# Altium PCB Bicikli_V1.PcbDoc (part 1 of 2)
Units mil, origin at the board's own origin, x right, y up, seen from the top; angles counter-clockwise.
Board outline 8366.14 x 3818.9 mil, 2 copper layers (Top Layer, Bottom Layer); 165 components, 79 nets, 501 pads, 940 vias.
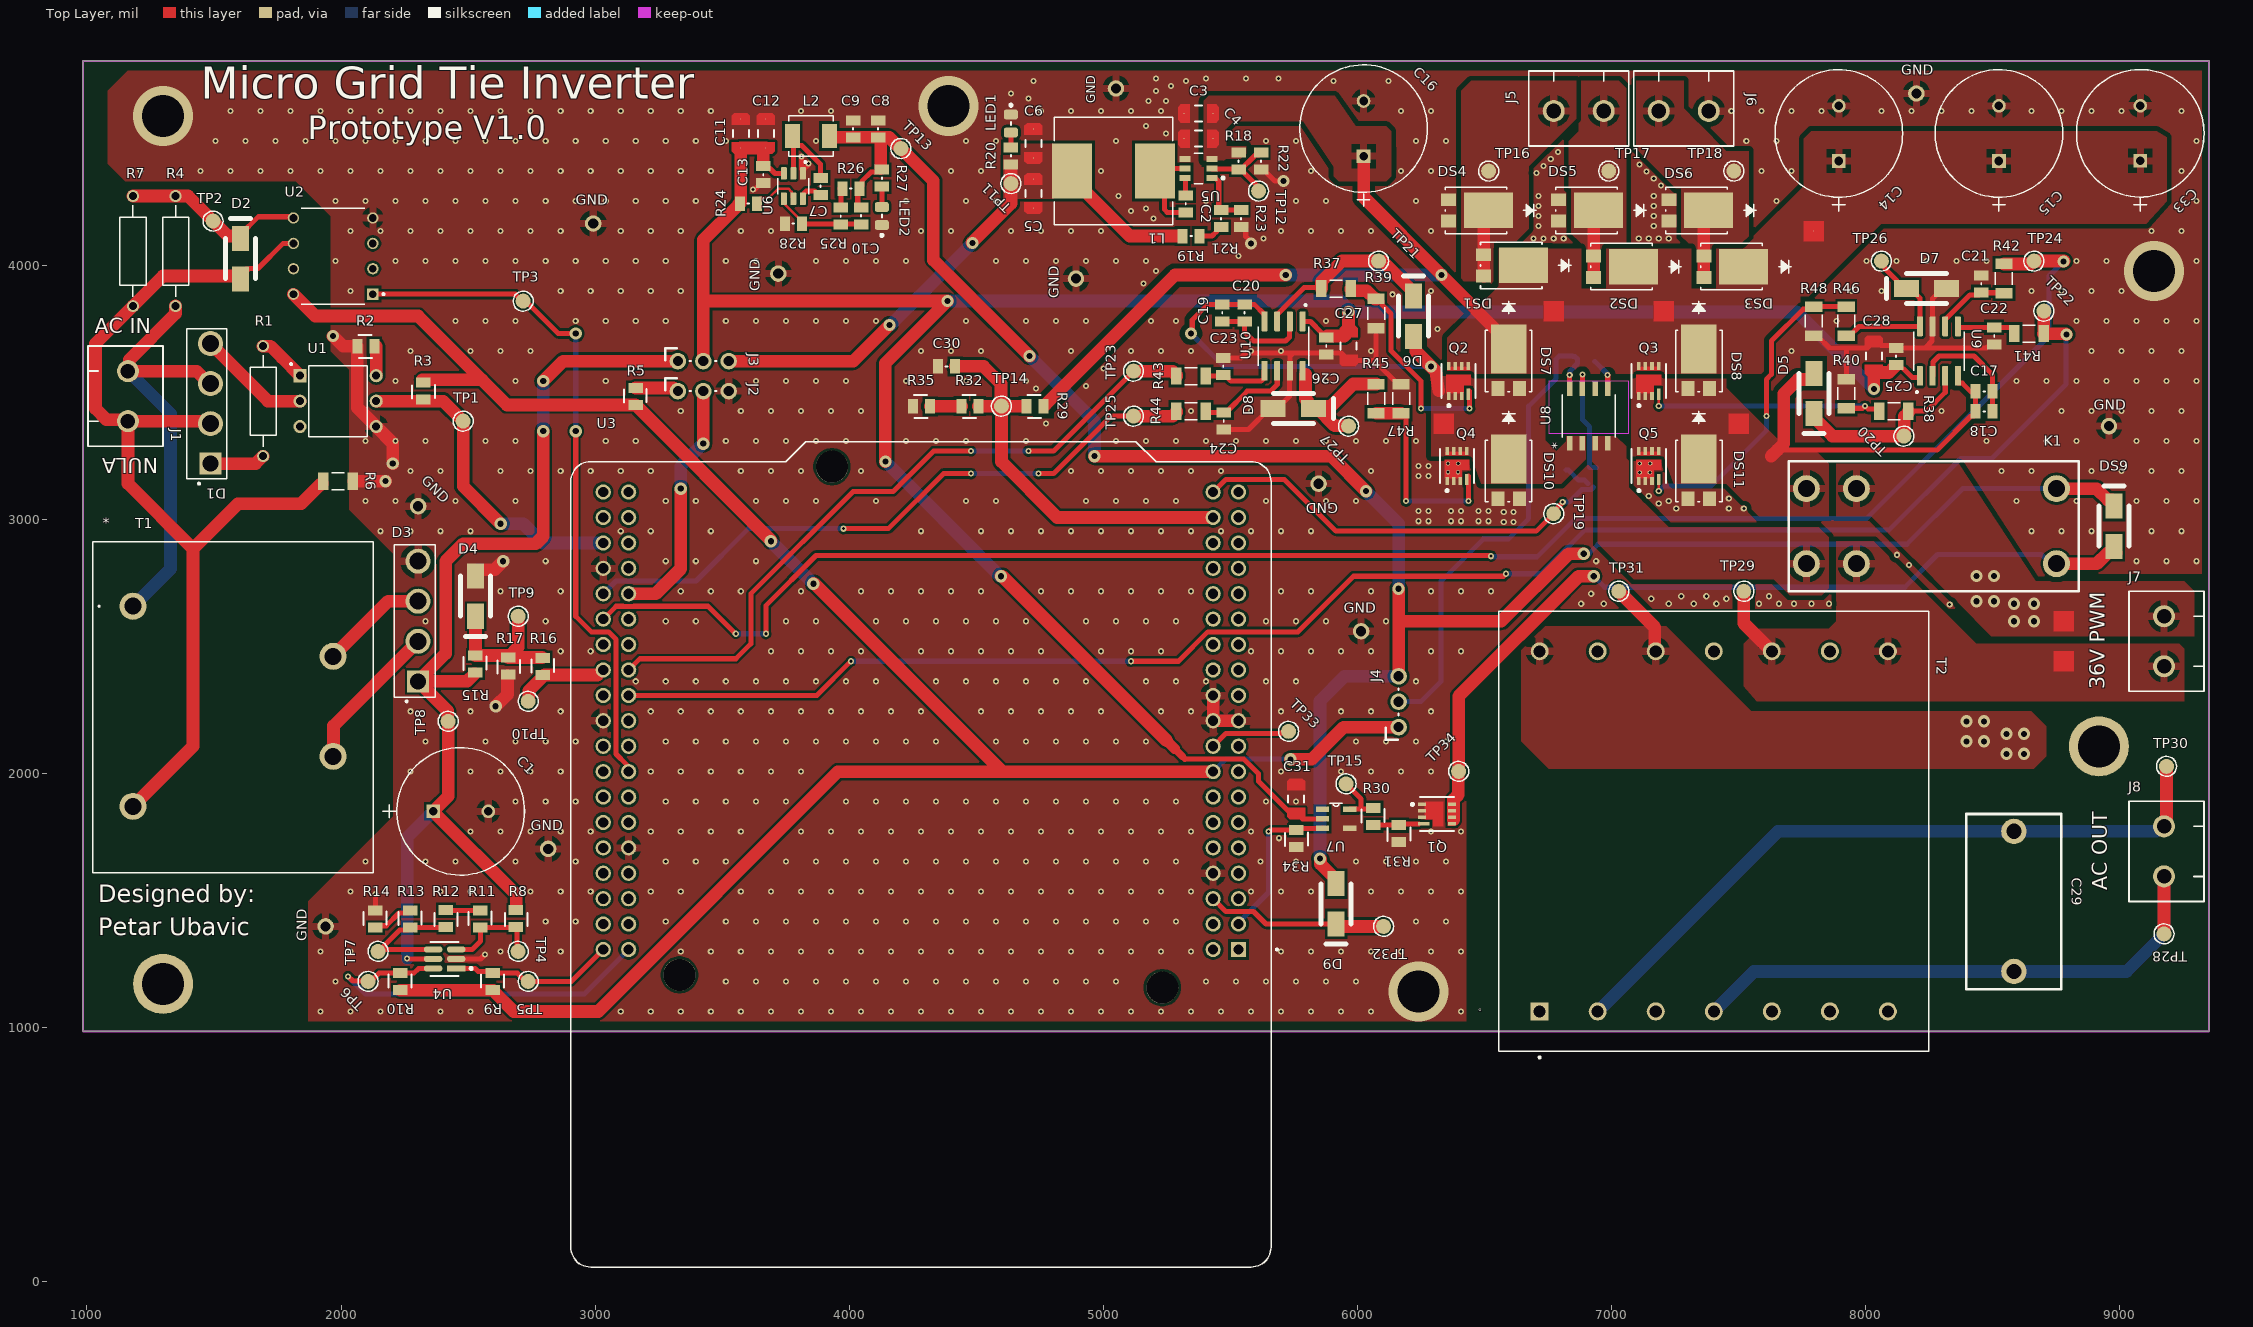
[diagram p0: Top Layer view]
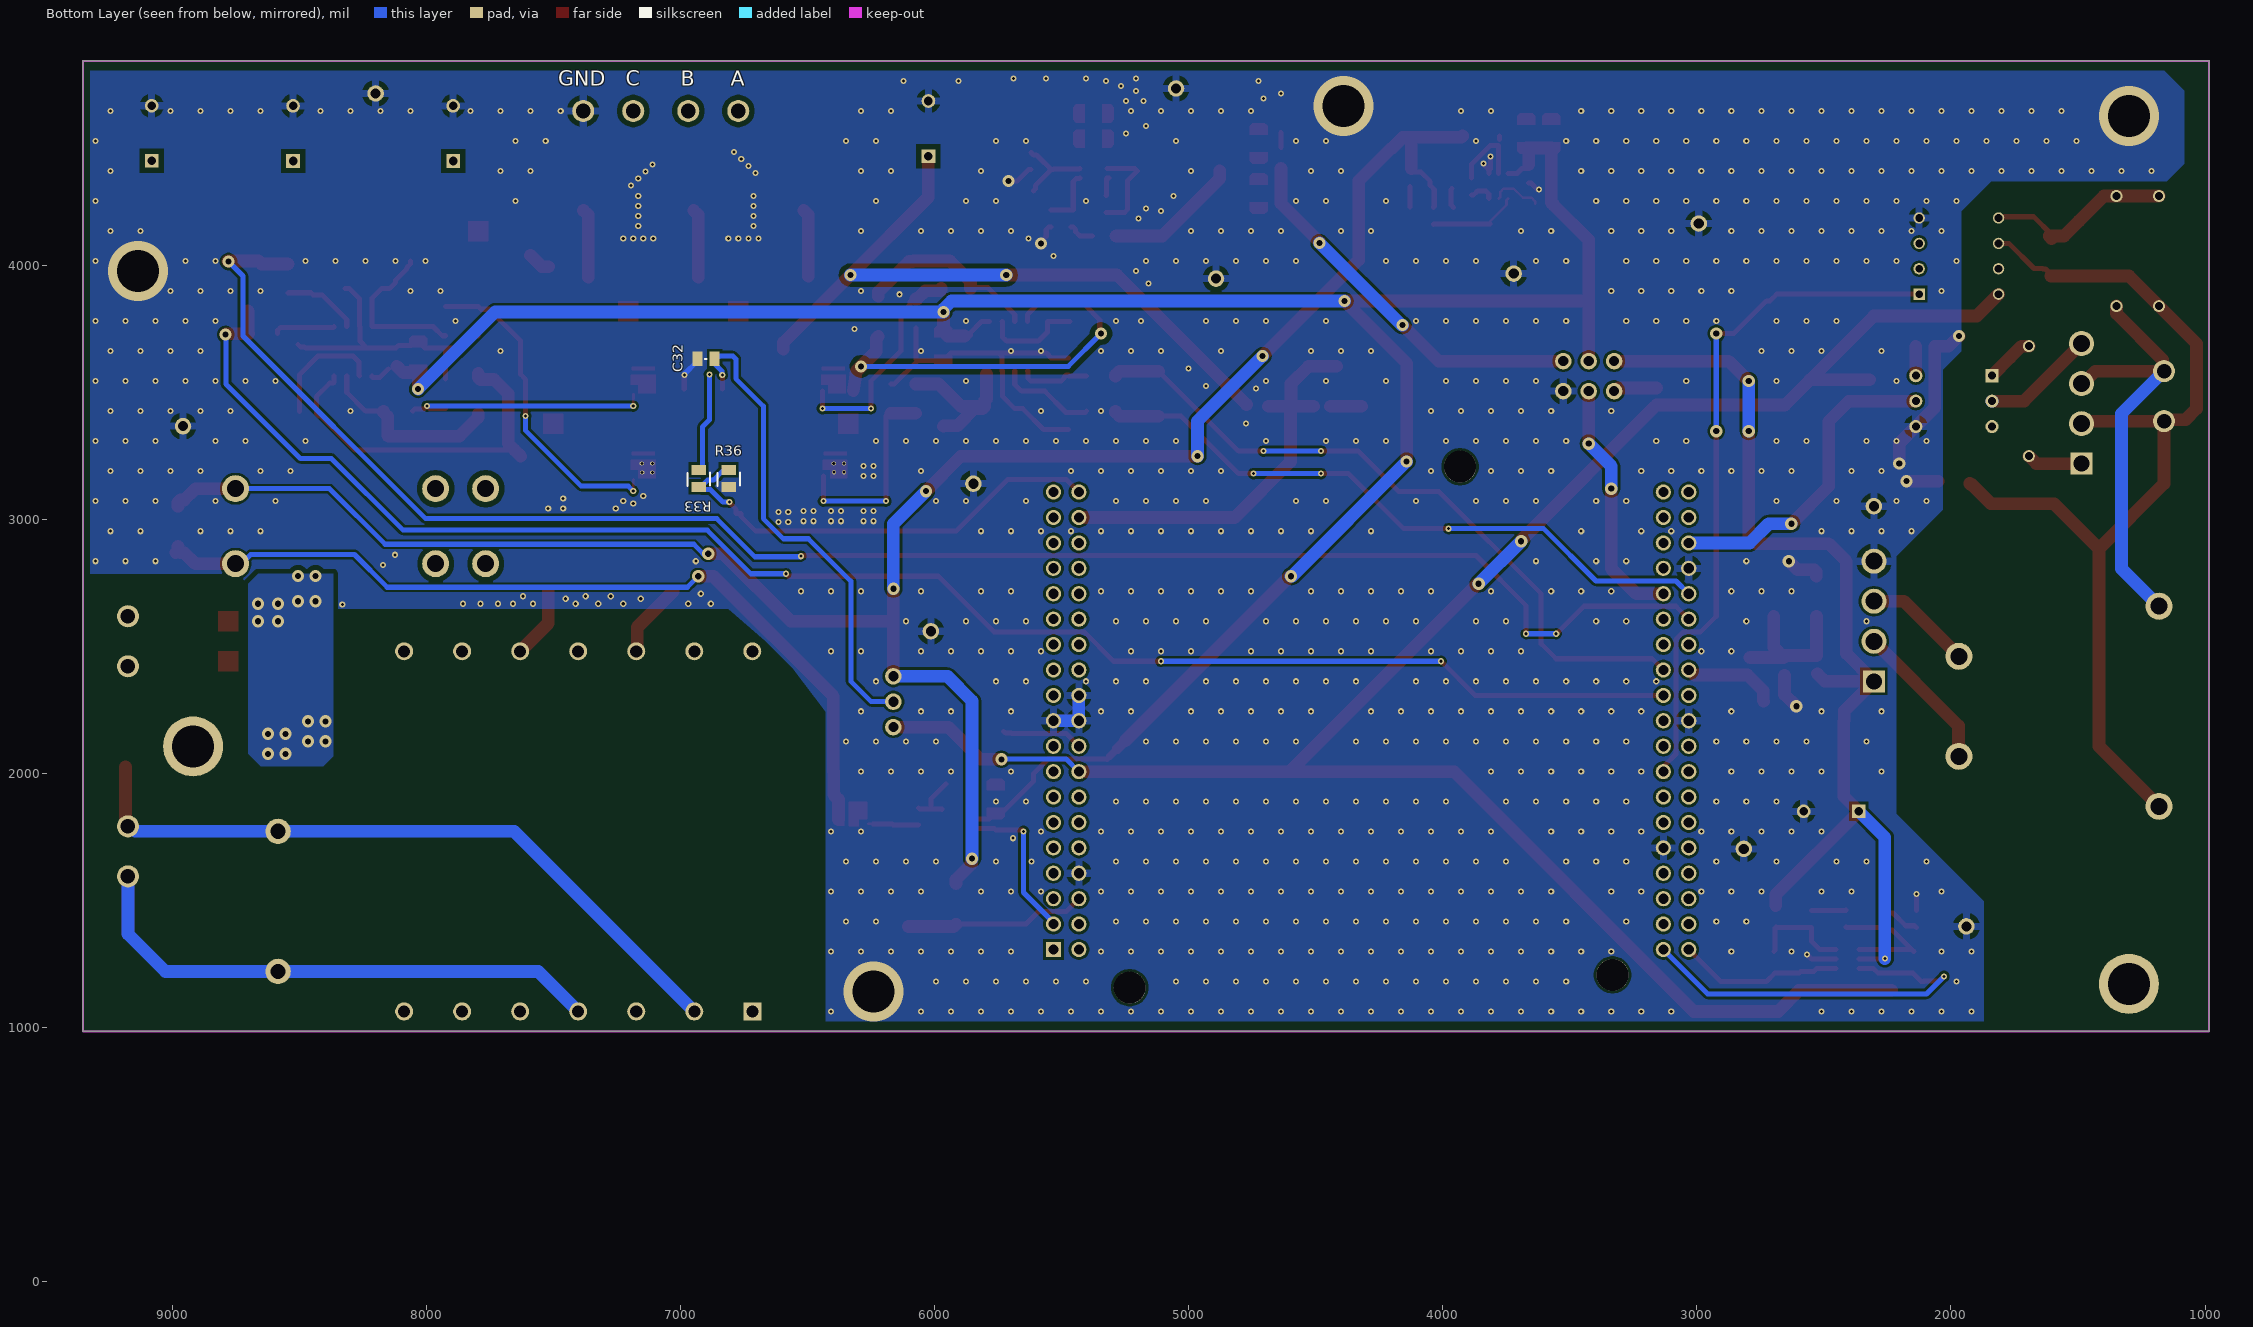
[diagram p1: Bottom Layer view, seen from below]
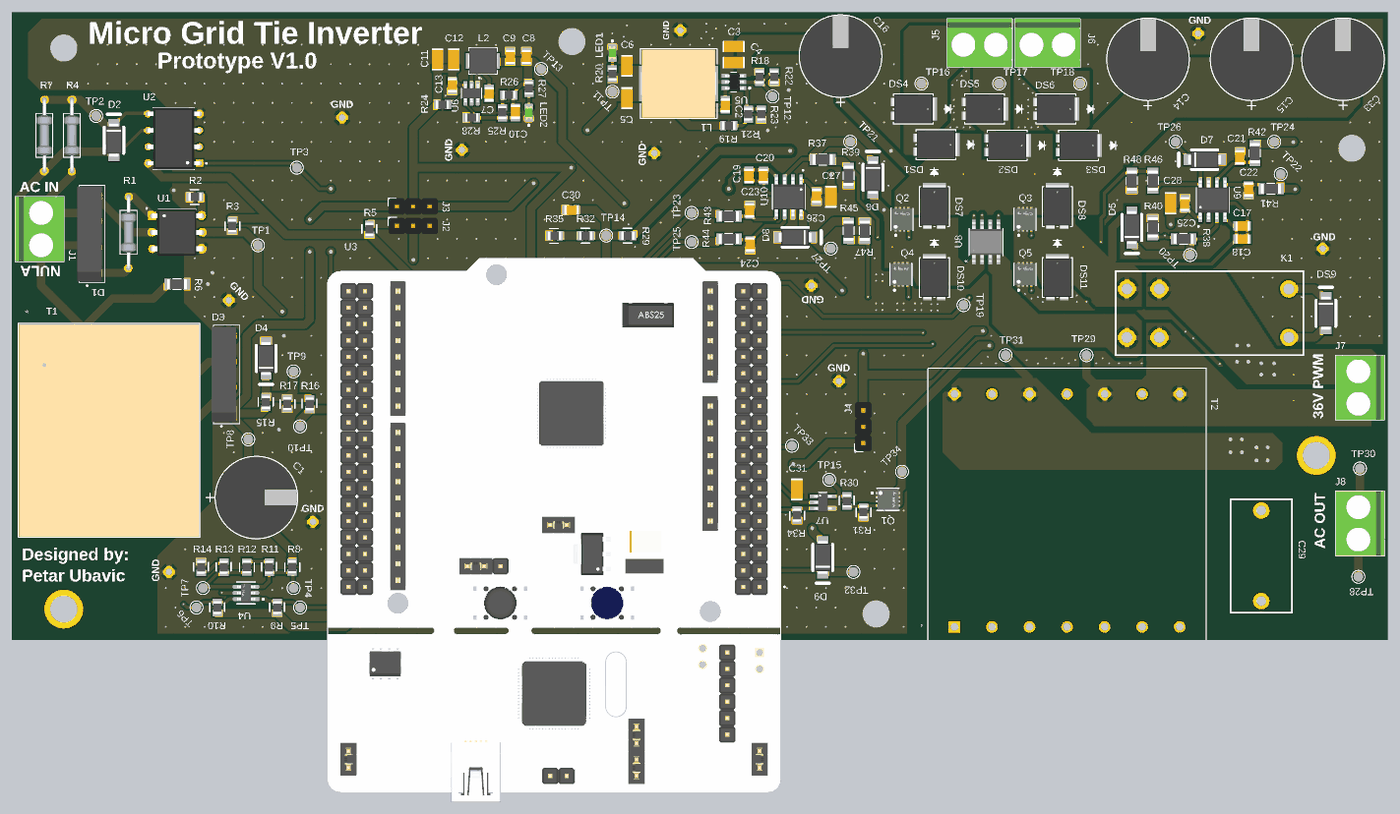
[diagram p3: 3D render of the assembled board from above, using the file's embedded part models]
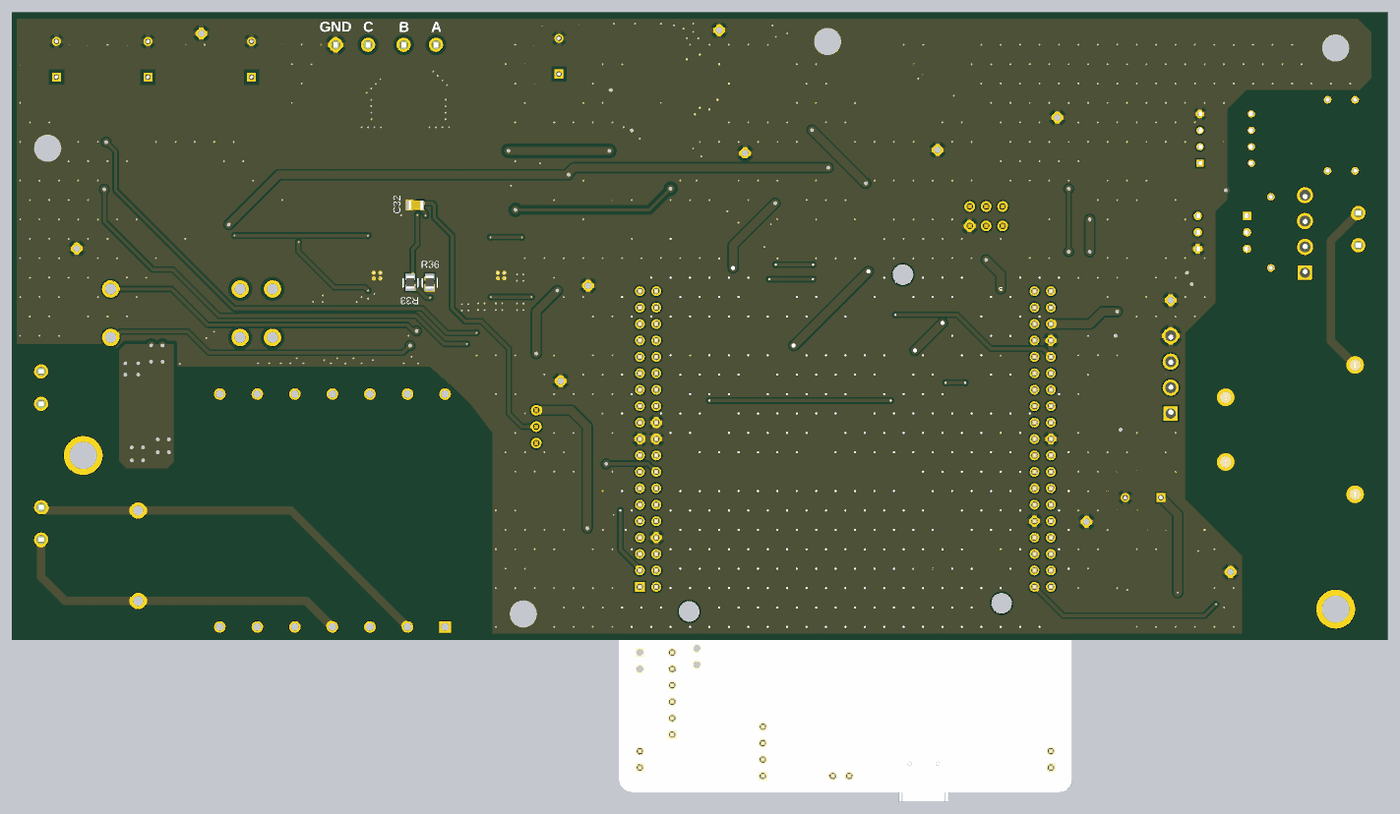
[diagram p4: 3D render of the assembled board from below, using the file's embedded part models]

## Layer stack, top to bottom
Top Solder: solder mask 0.4, Solder Resist, Dk 3.5
Top Layer: signal copper 1.4
Dielectric 1: dielectric 12.6, FR-4, Dk 4.8
Bottom Layer: signal copper 1.4
Bottom Solder: solder mask 0.4, Solder Resist, Dk 3.5

## Board outline
984.25,984.25 9350.39,984.25 9350.39,4803.15 984.25,4803.15

## Design rules (kind name [scope] priority, off if disabled: settings)
Clearance Clearance_PWR [InNetClass('PWR') vs InNetClass('SveOsimGejtSignala')] p1: gap=10 ignorepadtopadclearanceinfootprint=TRUE except(14: Arc-Region Track-Region SMDPad-Region THPad-Region Via-Region Fill-Region Poly-Region Region-Region; 15: Arc-Via Track-Via SMDPad-Via THPad-Via Via-Via; 20: Arc-Fill Arc-Poly Track-Fill Track-Poly SMDPad-Fill SMDPad-Poly THPad-Fill THPad-Poly Via-Fill Via-Poly Fill-Fill Fill-Poly Poly-Poly)
Clearance Clearance_HallIN+ [InNet('HallIN+')] p2 off: gap=10 ignorepadtopadclearanceinfootprint=TRUE except(15: Arc-Via Track-Via SMDPad-Via THPad-Via Via-Via; 20: Arc-Fill Arc-Poly Arc-Region Track-Fill Track-Poly Track-Region SMDPad-Fill SMDPad-Poly SMDPad-Region THPad-Fill THPad-Poly THPad-Region Via-Fill Via-Poly Via-Region Fill-Fill Fill-Poly Fill-Region Poly-Poly Poly-Region Region-Region)
Clearance Clearance_BrRight [InNet('BrRght')] p3 off: gap=10 ignorepadtopadclearanceinfootprint=TRUE except(15: Arc-Via Track-Via SMDPad-Via THPad-Via Via-Via; 20: Arc-Fill Arc-Poly Arc-Region Track-Fill Track-Poly Track-Region SMDPad-Fill SMDPad-Poly SMDPad-Region THPad-Fill THPad-Poly THPad-Region Via-Fill Via-Poly Via-Region Fill-Fill Fill-Poly Fill-Region Poly-Poly Poly-Region Region-Region)
Clearance [All] p4: gap=10 ignorepadtopadclearanceinfootprint=FALSE
Height [All] p1: minheight=0 maxheight=2500 prefheight=500
HoleSize [All] p1: absolutevalues=TRUE maxlimit=200 minlimit=1 maxpercent=80.000 minpercent=20.000
MinimumSolderMaskSliver [All] p1: minsoldermaskwidth=6
PlaneConnect [All] p1: pad.planeconnectstyle=Relief pad.reliefexpansion=20 pad.reliefentries=4 pad.reliefconductorwidth=20 pad.reliefairgap=10 via.planeconnectstyle=Direct via.reliefexpansion=20 via.reliefentries=4 via.reliefconductorwidth=10 via.reliefairgap=10
PolygonConnect [All] p1: thpad.connectstyle=Relief thpad.reliefconductorwidth=30 thpad.reliefentries=4 thpad.polygonreliefangle="90 Angle" thpad.airgapwidth=20 smdpad.connectstyle=Direct smdpad.reliefconductorwidth=10 smdpad.reliefentries=4 smdpad.polygonreliefangle="90 Angle" smdpad.airgapwidth=10 via.connectstyle=Direct via.reliefconductorwidth=10 via.reliefentries=4 via.polygonreliefangle="90 Angle" via.airgapwidth=10
RoutingVias [All] p1: holewidth=28 width=50 viastyle="Through Hole" minholewidth=28 minwidth=50 maxholewidth=28 maxwidth=50
SilkToSilkClearance [All] p1: silktosilkclearance=8
SilkToSolderMaskClearance [IsPad] p1: minsilkscreentomaskgap=6 clearancetoexposedcopper=TRUE
SolderMaskExpansion [All] p1: expansion=4 istentingtop=FALSE
SupplyNets "Schematic Supply Nets_3" [InNet('+36V')] p1: voltage=0.000
SupplyNets "Schematic Supply Nets_1" [InNet('+5v')] p2: voltage=0.000
SupplyNets "Schematic Supply Nets_12" [InNet('12V_TR')] p3: voltage=0.000
SupplyNets "Schematic Supply Nets_9" [InNet('12V_Buck')] p4: voltage=0.000
SupplyNets "Schematic Supply Nets_7" [InNet('12V_AC_PH')] p5: voltage=0.000
SupplyNets "Schematic Supply Nets_6" [InNet('GND')] p6: voltage=0.000
SupplyNets "Schematic Supply Nets_5" [InNet('+3v3')] p7: voltage=0.000
SupplyNets "Schematic Supply Nets_4" [InNet('Phase')] p8: voltage=0.000
SupplyNets "Schematic Supply Nets_2" [InNet('NULA')] p9: voltage=0.000
SupplyNets "Schematic Supply Nets" [InNet('12V')] p10: voltage=0.000
Width [All] p1: maxlimit=50 minlimit=10 preferedwidth=20
24 further rules are at their usual default settings.

## Classes and differential pairs
net class SveOsimGejtSignala: 12V 12V_AC_PH 12V_ADC 12V_Buck 12V_TR 24VAC+ 24VAC- +3v3 +5v +36V A B BrRght C FB5V FB36V FB_1 GND GridTie HallIN+ HallIN- HallSens "HO L" "HO R" "LO L" "LO R" NetC2_1 NetC2_2 NetC7_2 NetC17_2 NetC19_2 NetC21_2 NetC22_2 NetC23_2 NetC24_2 NetC29_1 NetC29_2 NetC32_2 NetD1_1 NetD1_4 NetD3_2 NetD4_2 NetD9_2 NetJ2_1 NetLED1_2 NetLED2_2 NetQ1_4 NetQ4_4 NetQ5_4 NetR1_1 NetR2_2 NetR8_1 NetR11_1 NetR12_1 NetR13_1 NetR18_1 NetR19_1 NetR24_1 NetR30_1 NetR32_1 NetR33_2 NetTP33_1 NULA OV Phase Phase_ADC Relay SW TIM1_CH1 TIM1_CH1N TIM1_CH2 TIM1_CH2N UV VSens ZeroTrig ZeroTrigOpto
net class PWR: 24VAC+ 24VAC- +36V A B BrRght C HallIN+ HallIN-
component class U_HBridge&Rectifier: C14 C15 C16 C17 C18 C19 C20 C21 C22 C23 C24 C25 C26 C27 C28 C29 C30 C31 C32 C33 D5 D6 D7 D8 DS1 DS2 DS3 DS4 DS5 DS6 DS7 DS8 DS9 DS10 DS11 J4 J5 J6 J7 J8 K1 Q1 Q2 Q3 Q4 Q5 R29 R30 R31 R32 R33 R34 R35 R36 R37 R38 R39 R40 R41 R42 R43 R44 R45 R46 R47 R48 T2 TP14 TP15 TP16 TP17 TP18 TP19 TP20 TP21 TP22 TP23 TP24 TP25 TP26 TP27 TP28 TP29 TP30 TP31 TP34 U7 U8 U9 U10
component class U_BUCK: C2 C3 C4 C5 C6 C7 C8 C9 C10 C11 C12 C13 J3 L1 L2 LED1 LED2 R18 R19 R20 R21 R22 R23 R24 R25 R26 R27 R28 TP11 TP12 TP13 U5 U6
component class Bicikli: C1 D1 D2 D3 D4 D9 J1 J2 R1 R2 R3 R4 R5 R6 R7 R8 R9 R10 R11 R12 R13 R14 R15 R16 R17 S T1 TP1 TP2 TP3 TP4 TP5 TP6 TP7 TP8 TP9 TP10 TP32 TP33 U1 U2 U3 U4

## Components (designator, comment, footprint, x,y, rotation, side; value= is the part's Value field where it differs from the comment)
C1 "1000uF 50V" "CAP_12.5 X 25_NCH" 2362.2,1850.39 r0 top
C2 "100n" CAP_0805 5324.8,4242.13 r270 top
C3 "10uF" CAP_1206 5374.02,4596.46 r0 top
C4 "10uF" CAP_1206 5374.02,4498.03 r0 top
C5 "22uF" CAP_1206 4724.41,4281.5 r90 top
C6 "22uF" CAP_1206 4724.41,4478.35 r270 top
C7 "100n" CAP_0805 3887.8,4311.02 r270 top
C8 "22u" CAP_0805 4114.17,4537.4 r270 top
C9 "22u" CAP_0805 4015.75,4537.4 r270 top
C10 "15p" CAP_0805 4045.28,4192.91 r90 top
C11 "10u" CAP_1206 3572.83,4517.72 r270 top
C12 "10u" CAP_1206 3671.26,4517.72 r270 top
C13 "100n" CAP_0805 3660.48,4355.27 r90 top
C14 "1000uF 50V" "CAP_12.5 X 25_NCH" 7893.7,4409.45 r90 top
C15 "1000uF 50V" "CAP_12.5 X 25_NCH" 8523.62,4409.45 r90 top
C16 "1000uF 50V" "CAP_12.5 X 25_NCH" 6023.62,4428.67 r90 top
C17 "100n" CAP_0805 8464.57,3503.94 r0 top
C18 "1n" CAP_0805 8464.57,3425.2 r0 top
C19 "100n" CAP_0805 5468.31,3813.17 r270 top
C20 "1n" CAP_0805 5555.96,3812.41 r270 top
C21 "1n" CAP_0805 8454.72,3927.17 r270 top
C22 "1n" CAP_0805 8503.94,3720.47 r90 top
C23 "1n" CAP_0805 5472.44,3602.36 r270 top
C24 "1n" CAP_0805 5472.44,3385.83 r90 top
C25 "100n" CAP_0805 8120.08,3641.98 r270 top
C26 "100n" CAP_0805 5875.98,3681.1 r90 top
C27 "10u" CAP_1206 5964.57,3681.1 r90 top
C28 "10u" CAP_1206 8031.5,3641.73 r270 top
C29 "TBD" CapacitorBig 8582.68,1496.06 r0 top
C30 "56p" CAP_0805 4381.89,3602.36 r0 top
C31 "10u" CAP_1206 5757.87,1899.61 r270 top
C32 "100n" CAP_0805 6899.61,3631.89 r180 bottom
C33 "1000uF 50V" "CAP_12.5 X 25_NCH" 9080,4410 r90 top
D1 "KBP208G" SIP350W80P400L1450H1280Q4 1466.54,3454.72 r90 top
D2 "SCH_DIODE" SMA 1604.33,4025.59 r90 top
D3 "KBP208G" SIP350W80P400L1450H1280Q4 2283.46,2598.43 r90 top
D4 "SCH_DIODE" SMA 2529.53,2696.85 r270 top
D5 "SCH_DIODE" SMA 7795.28,3494.09 r270 top
D6 "SCH_DIODE" SMA 6220.47,3799.21 r90 top
D7 "SCH_DIODE" SMA 8238.19,3907.48 r180 top
D8 "SCH_DIODE" SMA 5748.03,3435.04 r0 top
D9 "SCH_DIODE" SMA 5915.35,1486.22 r270 top
DS1 "PMEG45U10EPDZ" PMEG45U10EPDZ_NEX 6604.56,3998.62 r270 top
DS2 "PMEG45U10EPDZ" PMEG45U10EPDZ_NEX 7037.63,3993.5 r270 top
DS3 "PMEG45U10EPDZ" PMEG45U10EPDZ_NEX 7470.7,3993.5 r270 top
DS4 "PMEG45U10EPDZ" PMEG45U10EPDZ_NEX 6466.77,4215.16 r270 top
DS5 "PMEG45U10EPDZ" PMEG45U10EPDZ_NEX 6899.84,4215.16 r270 top
DS6 "PMEG45U10EPDZ" PMEG45U10EPDZ_NEX 7332.91,4215.16 r270 top
DS7 "PMEG45U10EPDZ" PMEG45U10EPDZ_NEX 6594.49,3622.05 r0 top
DS8 "PMEG45U10EPDZ" PMEG45U10EPDZ_NEX 7342.52,3622.05 r0 top
DS9 "SCH_DIODE" SMA 8976.38,2972.44 r90 top
DS10 "PMEG45U10EPDZ" PMEG45U10EPDZ_NEX 6594.49,3188.98 r0 top
DS11 "PMEG45U10EPDZ" PMEG45U10EPDZ_NEX 7342.52,3188.98 r0 top
J1 "Wire Terminal Block 2 pin 5mm" WireTerminalPCB5mm2PIN 1161.42,3484.25 r90 top
J2 "3Pin" HEADER3PIN 3425.2,3503.94 r0 top
J3 "3Pin" HEADER3PIN 3425.2,3622.05 r0 top
J4 "3Pin" HEADER3PIN 6161.42,2281.89 r90 top
J5 "Wire Terminal Block 2 pin 5mm" WireTerminalPCB5mm2PIN 6870.08,4606.3 r0 top
J6 "Wire Terminal Block 2 pin 5mm" WireTerminalPCB5mm2PIN 7283.46,4606.3 r0 top
J7 "Wire Terminal Block 2 pin 5mm" WireTerminalPCB5mm2PIN 9173.23,2519.68 r270 top
J8 "Wire Terminal Block 2 pin 5mm" WireTerminalPCB5mm2PIN 9173.23,1692.91 r270 top
K1 "K1" AZ733-2AE-5DE 8287.4,2952.76 r180 top
L1 "AMRM00101040100MA1" IND_AMRM00101040_PUL 5039.37,4370.08 r0 top
L2 "SRP4020TA-3R3M" IND_SRP4020TA-3R3M 3848.43,4507.87 r180 top
LED1 "LED GREEN" LED_GREEN_0805 4635.83,4557.09 r270 top
LED2 "LED GREEN" LED_GREEN_0805 4128,4193 r90 top
Q1 "IQE022N06LM5" IFX-PG-TSON-8-5-V 6312.2,1839.57 r0 top
Q2 "IQE022N06LM5" IFX-PG-TSON-8-5-V 6397.64,3543.31 r90 top
Q3 "IQE022N06LM5" IFX-PG-TSON-8-5-V 7145.67,3543.31 r90 top
Q4 "IQE022N06LM5" IFX-PG-TSON-8-5-V 6390.75,3208.67 r90 top
Q5 "IQE022N06LM5" IFX-PG-TSON-8-5-V 7145.67,3208.66 r90 top
R1 "10k" RESISTOR_THRUHOLE_1/4W 1692.91,3464.57 r270 top
R2 "10k" RESISTOR_0805 2096.46,3681.1 r0 top
R3 "4.7k" RESISTOR_0805 2322.83,3503.94 r90 top
R4 "1Meg" RESISTOR_THRUHOLE_1/4W 1348.43,4055.12 r270 top
R5 "4.7k" RESISTOR_0805 3159.45,3484.25 r270 top
R6 "0" RESISTOR_1206 1988.19,3149.61 r180 top
R7 "10k" RESISTOR_THRUHOLE_1/4W 1181.1,4055.12 r90 top
R8 "1Meg" RESISTOR_0805 2687.01,1427.17 r90 top
R9 "4.7k" RESISTOR_0805 2598.43,1181.1 r270 top
R10 "4.7k" RESISTOR_0805 2234.25,1181.1 r270 top
R11 "8.2k" RESISTOR_0805 2549.21,1427.17 r270 top
R12 "430" RESISTOR_0805 2411.42,1427.17 r90 top
R13 "27k" RESISTOR_0805 2273.62,1427.17 r270 top
R14 "2.4k" RESISTOR_0805 2135.83,1427.17 r270 top
R15 "10k" RESISTOR_0805 2529.53,2431.1 r270 top
R16 "0" RESISTOR_0805 2795.28,2421.26 r270 top
R17 "3.3k" RESISTOR_0805 2657.48,2421.26 r90 top
R18 "100k" RESISTOR_0805_SMALLSILK 5531.5,4409.45 r90 top
R19 "130k" RESISTOR_0805_SMALLSILK 5344.49,4114.17 r180 top
R20 "3.3k" RESISTOR_0805_SMALLSILK 4635.83,4429.13 r270 top
R21 "10k" RESISTOR_0805_SMALLSILK 5462.6,4183.07 r90 top
R22 "240k" RESISTOR_0805_SMALLSILK 5620.08,4409.45 r90 top
R23 "10k" RESISTOR_0805_SMALLSILK 5541.34,4183.07 r90 top
R24 "10k" RESISTOR_0805_SMALLSILK 3602.36,4242.13 r180 top
R25 "3.9k" RESISTOR_0805_SMALLSILK 3966.54,4192.91 r90 top
R26 "51k" RESISTOR_0805_SMALLSILK 4005.91,4301.18 r0 top
R27 "1k" RESISTOR_0805_SMALLSILK 4128,4342 r90 top
R28 "10k" RESISTOR_0805_SMALLSILK 3779.53,4163.39 r0 top
R29 "20k" RESISTOR_0805 4729.28,3445.82 r0 top
R30 "10" RESISTOR_0805 6062.99,1830.71 r270 top
R31 "1.8k" RESISTOR_0805 6161.42,1761.81 r90 top
R32 "1.2k" RESISTOR_0805 4473.38,3445.82 r0 top
R33 "0" RESISTOR_0805 6929.13,3159.45 r90 bottom
R34 "4.7k" RESISTOR_0805 5757.87,1742.13 r90 top
R35 "0" RESISTOR_0805 4283.46,3444.88 r0 top
R36 "0" RESISTOR_0805 6811.02,3159.45 r90 bottom
R37 "10" RESISTOR_1206 5915.35,3907.48 r0 top
R38 "10" RESISTOR_1206 8110.24,3425.2 r0 top
R39 "1.8k" RESISTOR_1206 6072.83,3809.06 r90 top
R40 "1.8k" RESISTOR_1206 7923.23,3494.09 r270 top
R41 "10" RESISTOR_1206 8641.73,3730.32 r0 top
R42 "10" RESISTOR_1206 8543.31,3946.85 r90 top
R43 "10" RESISTOR_1206 5344.49,3562.99 r0 top
R44 "10" RESISTOR_1206 5344.49,3425.2 r0 top
R45 "10" RESISTOR_1206 6072.83,3474.41 r270 top
R46 "10" RESISTOR_1206 7923.23,3779.21 r270 top
R47 "1.8k" RESISTOR_1206 6171.26,3474.41 r270 top
R48 "1.8k" RESISTOR_1206 7795.28,3779.21 r90 top
T1 "BV302S12023" BV302S12023_ZLM 1181.1,2657.48 r0 top
T2 "SLLC-ETD39-24" XFMR_SLLC-ETD39-48 7401.57,1771.65 r90 top
TP1 "TP" TP 2480.32,3385.83 r180 top
TP2 "TP" TP 1496.06,4173.23 r270 top
TP3 "TP" TP 2716.54,3858.27 r270 top
TP4 "TP" TP 2696.85,1299.21 r270 top
TP5 "TP" TP 2736.22,1181.1 r270 top
TP6 "TP" TP 2106.3,1181.1 r135 top
TP7 "TP" TP 2145.67,1299.21 r0 top
TP8 "TP" TP 2421.26,2204.72 r270 top
TP9 "TP" TP 2696.85,2618.11 r270 top
TP10 "TP" TP 2736.22,2283.46 r270 top
TP11 "TP" TP 4635.83,4320.87 r90 top
TP12 "TP" TP 5610.24,4291.34 r90 top
TP13 "TP" TP 4202.76,4458.66 r315 top
TP14 "TP" TP 4598.43,3444.88 r270 top
TP15 "TP" TP 5954.72,1958.66 r270 top
TP16 "TP" TP 6515.75,4370.08 r270 top
TP17 "TP" TP 6988.19,4370.08 r270 top
TP18 "TP" TP 7480.31,4370.08 r270 top
TP19 "TP" TP 6771.65,3021.65 r180 top
TP20 "TP" TP 8149.61,3326.77 r90 top
TP21 "TP" TP 6082.68,4015.75 r270 top
TP22 "TP" TP 8700.79,3818.9 r90 top
TP23 "TP" TP 5118.11,3582.68 r315 top
TP24 "TP" TP 8661.42,4015.75 r180 top
TP25 "TP" TP 5118.11,3405.51 r0 top
TP26 "TP" TP 8061.02,4015.75 r90 top
TP27 "TP" TP 5964.57,3366.14 r270 top
TP28 "TP" TP 9173.23,1368.11 r90 top
TP29 "TP" TP 7519.69,2716.54 r270 top
TP30 "TP" TP 9183.07,2027.56 r90 top
TP31 "TP" TP 7027.56,2716.54 r270 top
TP32 "TP" TP 6102.36,1397.64 r270 top
TP33 "TP" TP 5728.35,2165.35 r270 top
TP34 "TP" TP 6397.64,2007.87 r270 top
U1 "4N25" DIP762W50P254L712H400Q6N 1988.19,3464.57 r0 top
U2 "LM2903P" DIP794W45P254L959H508Q8 1968.5,4035.43 r180 top
U3 "NUCLEO-L476RG" MODULE_NUCLEO-L476RG 4281.5,1681.1 r180 top
U4 "TPS3700DDCR" FP-DDC0006A-IPC_A 2407.49,1269.69 r180 top
U5 "LMR51625XFDDCR" DDC0006A-MFG 5374.02,4379.92 r180 top
U6 "TPS562201DDCR" SOT95P280X110-6N 3779.53,4311.02 r270 top
U7 "MCP1416T-E/OT" SOT95P270X145-5N 5915.35,1820.87 r0 top
U8 "TMCS1101A3BQDRQ1" SOIC8_D_TEX 6909.45,3405.51 r90 top
U9 "UCC27282DR" SOIC127P599X175-8N 8287.4,3661.42 r90 top
U10 "UCC27282DR" SOIC127P599X175-8N 5708.66,3681.1 r270 top

## Footprints (in the part's own frame and the unit in brackets; to place one, negate y for a bottom-side part, rotate by r counter-clockwise, add the part's x,y. Pads: shape width x height; smd on the part's side, far side on the other; paste and mask are expansions set on the pad)
AZ733-2AE-5DE [mm] "Relay AZ733-2AE-5DE"
  round 2.7 hole 1.7: 1(-11.75,3.25) 3(8.25,3.25) 4(13.25,3.25) 5(13.25,-4.25) 6(8.25,-4.25) 8(-11.75,-4.25)
  silkscreen extent -14,-7 15,6
BV302S12023_ZLM [mm]
  round 2.7 hole 1.7 paste-2539.97 mask+0: 1(0,0) 5(0,-20) 7(20,-15) 9(20,-5)
  silkscreen extent -4.02,-26.62 24.02,6.43, body extent -3.89,-26.49 23.89,6.3, height 29.8
"CAP_12.5 X 25_NCH" [mil]
  rect 54x54 / inner round 60 / far side rect 54x54 hole 34 paste-99999 mask+0: 1(0,0)
  round 54 / inner round 60 / far side round 54 hole 34 paste-99999 mask+0: 2(217,0)
  silkscreen extent -198,-251 360,251, body extent -137,-245 355,245, height 985
CAP_0805 [mm]
  rect 1x1.45 smd mask+0.102: 1(-0.824,-0.024) 2(0.876,-0.024)
  silkscreen extent -0.08,-0.03 0.1,-0.03, body extent -0.97,-0.76 1.23,0.69, height 0.6
CAP_1206 [mil] "Chip Capacitor, 2-Leads, Body 3.20x1.60mm, IPC Medium Density"
  round 1 smd: 1(-57.09,0) 2(57.09,0)
  Top Layer region: -79.72,-25.28 -79.72,25.28 -69.57,35.43 -34.45,35.43 -34.45,-35.43 -69.57,-35.43
  Top Layer region: 34.45,-35.43 34.45,35.43 69.57,35.43 79.72,25.28 79.72,-25.28 69.57,-35.43
  silkscreen extent -14,-31 14,31, body extent -67,-35 67,35, height 35
CapacitorBig [mil]
  round 100 hole 60: 1(0,275.59) 2(0,-275.59)
  silkscreen extent -187,-346 187,344
DDC0006A-MFG [mm]
  rect 1.1x0.6 smd paste+0 mask+0: 1(-1.35,0.95) 2(-1.35,0) 3(-1.35,-0.95) 4(1.35,-0.95) 5(1.35,0) 6(1.35,0.95)
  silkscreen extent -2.58,-1.53 0.42,1.53, body extent -1.56,-1.45 1.31,1.45, height 0.95
DIP762W50P254L712H400Q6N [mm]
  rect 1.308x1.308 / inner round 1.308 / far side rect 1.308x1.308 hole 0.8: 1(-3.81,2.54)
  round 1.308 hole 0.8: 2(-3.81,0) 3(-3.81,-2.54) 4(3.81,-2.54) 5(3.81,0) 6(3.81,2.54)
  silkscreen extent -4.8,-3.56 2.92,3.8, body extent -3.98,-3.56 3.98,3.56, height 4
DIP794W45P254L959H508Q8 [mm]
  rect 1.13x1.13 / inner round 1.13 / far side rect 1.13x1.13 hole 0.78 mask+0.102: 1(-3.97,3.81)
  round 1.13 hole 0.78 mask+0.102: 2(-3.97,1.27) 3(-3.97,-1.27) 4(-3.97,-3.81) 5(3.97,-3.81) 6(3.97,-1.27) 7(3.97,1.27) 8(3.97,3.81)
  silkscreen extent -5.13,-4.79 3.18,4.79, body extent -4.15,-4.79 4.15,4.79, height 5.08
FP-DDC0006A-IPC_A [mm]
  rect 1.854x0.612 smd paste+0 mask+0: 1(-1.15,0.95)
  rrect100% 1.854x0.612 smd paste+0 mask+0: 2(-1.15,0) 3(-1.15,-0.95) 4(1.15,-0.95) 5(1.15,0) 6(1.15,0.95)
  silkscreen extent -2.78,-1.7 1.4,1.7, body extent -2.58,-1.95 2.58,1.95, height 0.25
HEADER3PIN [mil]
  round 65 hole 40: 1(-100,0) 2(0,0) 3(100,0)
  silkscreen extent -150,0 53,50, body extent -151,-50 149,50, height 350
IFX-PG-TSON-8-5-V [mm] "PG-TSON-8-5, 0.65 mm pitch, 8 pin, 3.30mm L X 3.30mm W X 1.10mm H body"
  rect 0.8x0.35 smd paste-0.175 mask+0: 1(-1.5,0.975) 2(-1.5,0.325) 3(-1.5,-0.325) 5(1.5,-0.975) 6(1.5,-0.325) 7(1.5,0.325) 8(1.5,0.975)
  rect 1.14x0.35 smd paste-0.175 mask+0: 4(-1.33,-0.975)
  Top Layer region: 0.655,-1.23 0.655,1.23 -1.225,1.23 -1.225,-0.5 -0.36,-0.5 -0.36,-1.23
  Top Layer region: 1.1,1.15 1.1,-1.15 1.45,-1.15 1.45,1.15
  silkscreen extent -2.58,-1.7 1.7,1.7, body extent -1.65,-1.65 1.65,1.65, height 1.11
IND_AMRM00101040_PUL [mm]
  rect 4x5.5 smd paste+0 mask+0: 1(-4.127,0) 2(4.128,0)
  silkscreen extent -5.93,-5.37 5.93,5.37, body extent -5.8,-5.24 5.8,5.24, height 3.99
IND_SRP4020TA-3R3M [mm]
  rect 1.5x2.4 smd: 1(-1.85,0) 2(1.85,0)
  silkscreen extent -2.23,-2.03 2.22,2.03, body extent -2.23,-2.03 2.22,2.03, height 2
LED_GREEN_0805 [mm]
  rrect50% 1x1.4 smd: 1(-0.9,0) 2(0.9,0)
  silkscreen extent -1.95,-0.12 0.13,0.13, body extent -1.01,-0.62 1.01,0.63, height 1.1
MODULE_NUCLEO-L476RG [mil]
  rect 60x60 / inner round 60 / far side rect 60x60 hole 40: CN7_1(-1250,374.41)
  round 60 hole 40: CN7_2(-1150,374.41) CN7_3(-1250,274.41) CN7_4(-1150,274.41) CN7_5(-1250,174.41) CN7_6(-1150,174.41) CN7_7(-1250,74.41) CN7_8(-1150,74.41) CN7_9(-1250,-25.59) CN7_10(-1150,-25.59) CN7_11(-1250,-125.59) CN7_12(-1150,-125.59) CN7_13(-1250,-225.59) CN7_14(-1150,-225.59) CN7_15(-1250,-325.59) CN7_16(-1150,-325.59) CN7_17(-1250,-425.59) CN7_18(-1150,-425.59) CN7_19(-1250,-525.59) CN7_20(-1150,-525.59) CN7_21(-1250,-625.59) CN7_22(-1150,-625.59) CN7_23(-1250,-725.59) CN7_24(-1150,-725.59) CN7_25(-1250,-825.59) CN7_26(-1150,-825.59) CN7_27(-1250,-925.59) CN7_28(-1150,-925.59) CN7_29(-1250,-1025.59) CN7_30(-1150,-1025.59) CN7_31(-1250,-1125.59) CN7_32(-1150,-1125.59) CN7_33(-1250,-1225.59) CN7_34(-1150,-1225.59) CN7_35(-1250,-1325.59) CN7_36(-1150,-1325.59) CN7_37(-1250,-1425.59) CN7_38(-1150,-1425.59) CN10_1(1150,374.41) CN10_2(1250,374.41) CN10_3(1150,274.41) CN10_4(1250,274.41) CN10_5(1150,174.41) CN10_6(1250,174.41) CN10_7(1150,74.41) CN10_8(1250,74.41) CN10_9(1150,-25.59) CN10_10(1250,-25.59) CN10_11(1150,-125.59) CN10_12(1250,-125.59) CN10_13(1150,-225.59) CN10_14(1250,-225.59) CN10_15(1150,-325.59) CN10_16(1250,-325.59) CN10_17(1150,-425.59) CN10_18(1250,-425.59) CN10_19(1150,-525.59) CN10_20(1250,-525.59) CN10_21(1150,-625.59) CN10_22(1250,-625.59) CN10_23(1150,-725.59) CN10_24(1250,-725.59) CN10_25(1150,-825.59) CN10_26(1250,-825.59) CN10_27(1150,-925.59) CN10_28(1250,-925.59) CN10_29(1150,-1025.59) CN10_30(1250,-1025.59) CN10_31(1150,-1125.59) CN10_32(1250,-1125.59) CN10_33(1150,-1225.59) CN10_34(1250,-1225.59) CN10_35(1150,-1325.59) CN10_36(1250,-1325.59) CN10_37(1150,-1425.59) CN10_38(1250,-1425.59)
  round 125.98 hole 125.98 unplated: ""(-950,524.41) ""(350,-1525.59) ""(950,474.41)
  silkscreen extent -1405,-1624 1378,1624, body extent -1378,-1624 1378,1681, height 798
PMEG45U10EPDZ_NEX [mil]
  rect 51x59 smd paste+0 mask+0: 1(41.93,-108.5) 2(-41.93,-108.5)
  rect 140x193 smd paste+0 mask+0: 3(0,47.5)
  silkscreen extent -92,-121 92,236, body extent -86,-130 86,130, height 34
RESISTOR_0805 [mm]
  rect 1x1.45 smd mask+0.102: 1(-0.824,-0.024) 2(0.876,-0.024)
  silkscreen extent -0.72,-1.19 0.61,1.09, body extent -0.97,-0.65 1.03,0.6, height 0.6
RESISTOR_0805_SMALLSILK [mm]
  rect 1x1.45 smd mask+0.102: 1(-0.849,0.002) 2(0.851,0.002)
  silkscreen extent -0.1,0 0.08,0, body extent -0.97,-0.63 1.03,0.63, height 0.6
RESISTOR_1206 [mm]
  rect 1.05x1.72 smd: 1(-1.46,0) 2(1.46,0)
  silkscreen extent -0.62,-0.85 0.62,0.85, body extent -1.55,-0.77 1.55,0.77, height 0.65
RESISTOR_THRUHOLE_1/4W [mm] "Thruhole Resistor 1/4W"
  round 1.2 hole 0.8: 1(-5.5,0) 2(5.5,0)
  silkscreen extent -4.58,-1.3 4.58,1.3, body extent -5.77,-1.2 5.77,1.2, height 2.4
SIP350W80P400L1450H1280Q4 [mm]
  rect 2.2x2.2 / inner round 2.2 / far side rect 2.2x2.2 hole 1.6: 1(-6,-0.491)
  round 2.5 hole 1.7: 2(-2,-0.491) 3(2,-0.491) 4(6,-0.491)
  silkscreen extent -8.1,-2.12 7.5,1.88, body extent -7.35,-1.65 7.35,2.15, height 12.7
SMA [mm]
  rect 2.5x1.7 smd: 1(-2.032,0) 2(2,0)
  silkscreen extent -2,-1.5 4,1.5, body extent -2.6,-1.3 2.6,1.3, height 2.4
SOIC8_D_TEX [mil]
  rect 57.5x22 smd paste+0 mask+0: 1(-107.25,75) 2(-107.25,25) 3(-107.25,-25) 4(-107.25,-75) 5(107.25,-75) 6(107.25,-25) 7(107.25,25) 8(107.25,75)
  silkscreen extent -84,-104 84,104, body extent -122,-99 122,99, height 69
SOIC127P599X175-8N [mm]
  rrect25% 1.97x0.6 smd: 1(-2.47,1.905) 2(-2.47,0.635) 3(-2.47,-0.635) 4(-2.47,-1.905) 5(2.47,-1.905) 6(2.47,-0.635) 7(2.47,0.635) 8(2.47,1.905)
  silkscreen extent -4.2,-2.53 1.95,2.52, body extent -3,-2.45 3,2.45, height 1.75
SOT95P270X145-5N [mil]
  rect 52x22 smd: 1(-54,37) 2(-54,0) 3(-54,-37) 4(54,-37) 5(54,37)
  silkscreen extent -25,49 25,61, body extent -52,-57 54,57, height 57
SOT95P280X110-6N [mm]
  rrect25% 1.25x0.59 smd: 1(-1.255,0.95) 2(-1.255,0) 3(-1.255,-0.95) 4(1.255,-0.95) 5(1.255,0) 6(1.255,0.95)
  silkscreen extent -2.5,-1.57 0.8,1.57, body extent -1.4,-1.45 1.4,1.45, height 1.1
TP [mm] "1.5mm radius Test Point"
  round 1.5 smd mask+0.051: 1(0,0)
  silkscreen extent -1,-1 1,1
WireTerminalPCB5mm2PIN [mm] "WireTerminalPCB5mm2PIN"
  round 2.2 hole 1.45: 1(-2.5,0) 2(2.5,0)
  silkscreen extent -5,-3.5 5,4, body extent -5,-3.5 5,4, height 11.5
XFMR_SLLC-ETD39-48 [mm]
  rect 1.8x1.8 / inner round 1.8 / far side rect 1.8x1.8 hole 1.2: 1(-18,17.4)
  round 1.8 hole 1.2: 2(-18,11.6) 3(-18,5.8) 4(-18,0) 5(-18,-5.8) 6(-18,-11.6) 7(-18,-17.4) 8(18,-17.4) 9(18,-11.6) 10(18,-5.8) 11(18,0) 12(18,5.8) 13(18,11.6) 14(18,17.4)
  silkscreen extent -22.7,-21.5 22,21.5

## Part data
C1 C14 C15 C16 C33: library part UVY1H102MHD, "UVY1H102MHD", Manufacturer_Name=Nichicon, Copyright="Copyright (C) 2025 Ultra Librarian. All rights reserved.", Manufacturer_Part_Number=UVY1H102MHD
C2 C7 C13 C17 C19 C25 C26 C32: library part C00079, "CAP 100nF ±10% 50V 0805 X7R", capacitance=100n
C3 C4: library part C000020, "10 µF ±10% 50V Ceramic Capacitor X7R 1206 (3216 Metric)", capacitance=22uF, DigiKey part number=1276-3047-1-ND, ComponentLink1Description=DigiKey, ComponentLink1URL=https://www.digikey.com/en/products/detail/samsung-electro-mechanics/CL31A226KAHNNNE/3888705
C5 C6: library part C000020, "22 µF ±10% 25V Ceramic Capacitor X5R 1206 (3216 Metric)", DigiKey part number=1276-3047-1-ND, capacitance=22uF, ComponentLink1Description=DigiKey, ComponentLink1URL=https://www.digikey.com/en/products/detail/samsung-electro-mechanics/CL31A226KAHNNNE/3888705
C8 C9: library part C00086, "CAP 22uF ±20% 10V 0805 X5R", capacitance=22u
C10: library part C00026, "CAP 15pF ±5% 50V 0805 C0G", capacitance=15p
C11 C12: library part C00084, "CAP 10uF ±10% 25V 0805 X5R", capacitance=4.7u
C18 C20 C21 C22 C23 C24: library part C00059, "CAP 1nF ±10% 50V 0805 X7R", capacitance=1n
C27 C28 C31: library part C00085, "CAP 10uF ±10% 10V 0805 X5R", capacitance=10u
C29: library part C00059, "CAP 1nF ±10% 50V 0805 X7R", capacitance=1n
C30: library part C00039, "CAP 56pF ±5% 50V 0805 C0G", capacitance=56p
D1 D3: "Bridge Rectifier Single Phase Standard 100 V Through Hole KBP", Package="SIP-4 GeneSiC Semiconductor", Check_prices=https://www.snapeda.com/parts/KBP202G/GeneSiC+Semiconductor/view-part/?ref=eda, MF="GeneSiC Semiconductor", MP=KBP202G, SnapEDA_Link=https://www.snapeda.com/parts/KBP202G/GeneSiC+Semiconductor/view-part/?ref=snap
DS1 DS2 DS3 DS4 DS5 DS6 DS7 DS8 DS10 DS11: "No Description Available", Manufacturer_Name=Nexperia, Copyright="Copyright (C) 2025 Ultra Librarian. All rights reserved.", Manufacturer_Part_Number=PMEG45U10EPDZ, RefDes=RefDes, Type=Type
J1 J5 J6 J7 J8: "Wire Terminal PCB Block 2 pin 5mm"
J2 J3 J4: library part HEADER3PIN, "3 PIN Male Header 2.54mm pitch"
K1: library part Relay, "AZ733-2AE-5DE Relay"
L1: "No Description Available", Manufacturer_Name="Pulse Electronics Corporation", Copyright="Copyright (C) 2025 Ultra Librarian. All rights reserved.", Manufacturer_Part_Number=AMRM00101040100MA1, Type="Fixed Inductors"
L2: "Surface Mount Power Inductor, AEC-Q200 SRP4020TA Series, 15 H, 20%, Shielded, 0.374 ohm, 1.5 A", Package=None, Availability=Unavailable, MF="{'manufacturer': u'Bourns'}", MP=SRP4020TA-3R3M, Price=None
LED1 LED2: library part "LED_GREEN 0805", "LED GREEN CLEAR 0805 SMD", Color=Green, Lens Color=Colorless, Manufacturer=Kingbright, Manufacturer Part Number=APT2012SGC, Package Case="0805 (2012 Metric)", Recommended Rating=Platinum, Voltage Forward=2.2V, Assembly=SMD, Barcode=2911010024338, Category=Optoelectronics, Datasheet URL=http://www.kingbrightusa.com/images/catalog/SPEC/APT2012SGC.pdf, Family=LED, id=28, item_id=3342, Lens Transparency=Clear, Part Type=Optoelectronics, Wavelength=568nm
Q1 Q2 Q3 Q4 Q5: "Insulated-Gate Field-Effect Transistor (IGFET), N-Channel, Enhancement, Body Diode, Pin 1 Source, 2 Source, 3 Source, 4 Gate, 5 Drain, 6 Drain, 7 Drain, 8 Drain, 8 Pins", Manufacturer="Infineon Technologies", Manufacturer Order Number=IQE022N06LM5, PackageReference=PG-TSON-8-5
R1 R2 R7 R15 R21 R23 R24 R28: library part R000005, "RES  10k OHM 1% 1/8W 0805", resistance=10k
R3 R5 R9 R10 R34: library part R000116, "RES  4k7 OHM 1% 1/8W 0805", resistance=4.7k
R4 R8: library part R000007, "RES  1Meg OHM 1% 1/8W 0805", resistance=1Meg
R6 R16 R33 R35 R36: library part R000000, "RES  0 OHM JUMPER 1/8W 0805", resistance=1, Supplier Part Number 1=71-CRCW0805-1-E3, Supplier 1=Mouser, Supplier 2=Mouser, Supplier 3=Mouser, Supplier Part Number 2=667-ERJ-6RQF1R0V, Supplier Part Number 3=667-ERJ-6BQF1R0V
R11: library part R000158, "RES  8k2 OHM 1% 1/8W 0805", resistance=8.2k
R12: library part R000108, "RES  430 OHM 1% 1/8W 0805", resistance=430
R13: library part R000075, "RES  27k OHM 1% 1/8W 0805", resistance=27k
R14: library part R000067, "RES  2k4 OHM 1% 1/8W 0805", resistance=2.4k
R17 R20: library part R000088, "RES  3k3 OHM 1% 1/8W 0805", resistance=3.3k
R18: library part R000006, "RES  100k OHM 1% 1/8W 0805", resistance=100k
R19: library part R000027, "RES  130k OHM 1% 1/8W 0805", resistance=130k
R22: library part R000069, "RES  240k OHM 1% 1/8W 0805", resistance=240k
R25: library part R000102, "RES  3k9 OHM 1% 1/8W 0805", resistance=3.9k
R26: library part R000124, "RES  51k OHM 1% 1/8W 0805", resistance=51k
R27: library part R000004, "RES  1k OHM 1% 1/8W 0805", resistance=1k
R29: library part R000054, "RES  20k OHM 1% 1/8W 0805", resistance=20k
R30 R37 R38 R41 R42 R43 R44 R45 R46: library part R000002, "RES  10 OHM 1% 1/8W 0805", resistance=10
R31 R39 R40 R47 R48: library part R000060, "RES  1k8 OHM 1% 1/8W 0805", resistance=2.2k
R32: library part R000018, "RES  1k2 OHM 1% 1/8W 0805", resistance=1.2k
T1: "No Description Available", Manufacturer_Name="Zettler Magnetics", Copyright="Copyright (C) 2025 Ultra Librarian. All rights reserved.", Manufacturer_Part_Number=BV302S12023, RefDes=RefDes, Type="Power Transformers"
T2: library part SLLC-ETD39-48, "High Frequency Resonant Transformers", Package=None, Check_prices=https://www.snapeda.com/parts/SLLC-ETD39-48/Signal+Transformer/view-part/?ref=eda, MF="Signal Transformer", MP=SLLC-ETD39-48, SnapEDA_Link=https://www.snapeda.com/parts/SLLC-ETD39-48/Signal+Transformer/view-part/?ref=snap
TP1 TP2 TP3 TP4 TP5 TP6 TP7 TP8 TP9 TP10 TP11 TP12 TP13 TP14 TP15 TP16 TP17 TP18 TP19 TP20 TP21 TP22 TP23 TP24 TP25 TP26 TP27 TP28 TP29 TP30 TP31 TP32 TP33 TP34: "Test Point 1.5mm radius"
U1: "Optoisolator, Analog, 6-Pin DIP, Transistor, w/Base Connection", Package="DIP-6 Everlight Electronics CO., LTD", Check_prices=https://www.snapeda.com/parts/4N25/Vishay/view-part/?ref=eda, MF="Vishay Semiconductor", MP=4N25, SnapEDA_Link=https://www.snapeda.com/parts/4N25/Vishay/view-part/?ref=snap
U2: "Dual differential comparator", Package="PDIP-8 Texas", Check_prices=https://www.snapeda.com/parts/LM2903P/Texas+Instruments/view-part/?ref=eda, MF="Texas Instruments", MP=LM2903P, SnapEDA_Link=https://www.snapeda.com/parts/LM2903P/Texas+Instruments/view-part/?ref=snap
U3: "STM32L476RG, mbed-Enabled Development Nucleo-64 STM32L4 ARMÂ® CortexÂ®-M4 MCU 32-Bit Embedded Evaluation Board", Package=None, Check_prices=https://www.snapeda.com/parts/NUCLEO-L476RG/STMicroelectronics/view-part/?ref=eda, MF=STMicroelectronics, MP=NUCLEO-L476RG, SnapEDA_Link=https://www.snapeda.com/parts/NUCLEO-L476RG/STMicroelectronics/view-part/?ref=snap
U4: library part CMP-1708-00001-5, "IC COMP WINDOW W/REF 6SOT", Case/Package=SOT, Max Operating Temperature=125°C, Max Supply Voltage=18V, Min Operating Temperature=-40°C, Min Supply Voltage=1.8V, Nominal Supply Current=7uA, Number of Voltages Monitored=2, Operating Supply Current=5.5uA, Package Quantity=3000, Quiescent Current=11uA, Undervoltage Threshold=1.7V, Hysteresis=5.5mV, Lead Free="Lead Free", Mount="Surface Mount", Number of Channels=1, Number of Elements=2, Number of Pins=6, Packaging="Tape and Reel", Propagation Delay=29us, Radiation Hardening=No, REACH SVHC="No SVHC", Watchdog Timer=No
U5: "SIMPLE SWITCHERÂ® synchronous buck converter with 4.3V-to-60V, 2.5A and low quiescent current 6-SOT-23-THIN -40 to 150", Manufacturer_Name="Texas Instruments", Copyright="Copyright (C) 2025 Ultra Librarian. All rights reserved.", Datasheet=https://www.ti.com/lit/gpn/lmr51625, Manufacturer_Part_Number=LMR51625XFDDCR, RefDes=RefDes, Type=TYPE
U6: "4.5 V to 17 V input, 2 A output, synchronous step-down converter in Eco-mode 6-SOT-23-THIN -40 to 125", Package=None, Availability=Unavailable, MF="{'manufacturer': u'Texas Instruments'}", MP=TPS562201DDCR, Price=None
U7: "Low-Side Gate Driver IC Non-Inverting SOT-23-5", Package="SOT-23-5 Microchip", Availability=Good, Check_prices=https://www.snapeda.com/parts/MCP1416T-E/OT/Microchip/view-part/287469/?ref=eda, MF=Microchip, MP=MCP1416T-E/OT, Price=None, Purchase-URL=https://pricing.snapeda.com/search/part/MCP1416T-E/OT/?ref=eda, SnapEDA_Link=https://www.snapeda.com/parts/MCP1416T-E/OT/Microchip/view-part/287469/?ref=snap
U8: "AEC-Q100, Â±600-V,Â precision, isolated current sensor with internal reference 8-SOIC -40 to 125", Manufacturer_Name="Texas Instruments", Copyright="Copyright (C) 2025 Ultra Librarian. All rights reserved.", Datasheet=https://www.ti.com/lit/gpn/tmcs1101-q1, Manufacturer_Part_Number=TMCS1101A3BQDRQ1, RefDes=RefDes, Type=Type
U9 U10: "3-A, 120-V half-bridge gate driver with 5-V UVLO, interlock and enable", Package=None, Check_prices=https://www.snapeda.com/parts/UCC27282DR/Texas+Instruments/view-part/?ref=eda, MF="Texas Instruments", MP=UCC27282DR, SnapEDA_Link=https://www.snapeda.com/parts/UCC27282DR/Texas+Instruments/view-part/?ref=snap

## Free pads (board coordinates)
  round 236.22 hole 165.35: 0(1299.21,1171.26) 0(8917.32,2106.3)
  round 65 hole 40: 0(1938.98,1397.64) 0(2303.15,3051.18) 0(2814.96,1702.76) 0(2992.13,4163.39) 0(3720.47,3966.54) 0(4891.73,3946.85) 0(5049.21,4694.88) 0(5846.46,3139.76) 0(6013.78,2559.06) 0(8198.82,4675.2) 0(8956.69,3366.14)
  round 1 smd: 5(6338.58,3375.98) 5(6771.65,3818.9) 5(7204.72,3818.9) 5(7500,3375.98) 5(7795.28,4133.86) 5(8779.53,2598.43) 5(8779.53,2440.94)

## Via types
v1: diameter 24, hole 12, Top Layer to Bottom Layer, tented both sides, 820 vias
v2: diameter 24, hole 12, Top Layer to Bottom Layer, 55 vias
v3: diameter 48, hole 24, Top Layer to Bottom Layer, 52 vias
v4: diameter 17, hole 12, Top Layer to Bottom Layer, 8 vias
v5: diameter 236.22, hole 165.35, Top Layer to Bottom Layer, 4 vias
v6: diameter 48, hole 24, Top Layer to Bottom Layer, tented top, 1 vias

## Nets (pads, with @x,y where several pads share a name; then routed paths per layer and width w, separated by ;. In a path a pad name is that pad's centre, name@x,y a point inside that pad or via, vN(x,y) a via of type N, cw(c..) or ccw(c..) an arc to the next point about the centre after c; other vN are vias at no path point)
12V: C11.2 C12.2 C13.2 C25.2 C26.2 C27.2 C28.2 C31.2 J3.2 R24.2 U6.3 U7.2 U9.1 U10.1 | length 9558.3
  Top Layer w20: C12.2@3671.26,4460.63 3661.42,4450.79 3657.52,4446.89 3657.52,4393.66 C13.2@3661.42,4389.76 3671.1,4380.08 3687.81,4380.08 3707.46,4360.43 U6.3@3742.13,4360.43 ; 5320.5,2056.69 5552.21,2056.69 5610.24,1998.66 5610.24,1968.5 5736.22,1842.52 C31.2@5757.87,1842.52 5784.29,1820.87 U7.2@5861.35,1820.87 ; U10.1@5783.66,3778.35 5814.17,3778.35 5858.38,3734.14 5858.38,3725.28 5868.06,3715.6 C26.2@5876.92,3715.6 ; 8148.54,3591.62 8182.31,3557.85 8210.59,3557.85 8212.4,3559.66 U9.1@8212.4,3564.17
  Top Layer w25: 5310.26,2066.93 5320.5,2056.69
  Top Layer w30: 5280.73,2096.46 5310.26,2066.93
  Top Layer w40: 5248.82,2128.37 5280.73,2096.46
  Top Layer w50: J3.2@3425.2,3622.05 3425.2,3858.27 ; C13.2@3661.42,4395.08 3661.42,4450.79 ; C12.2@3671.26,4460.63 C11.2@3572.83,4460.63 3572.83,4245.61 3569.29,4242.06 R24.2@3568.87,4242.06 3567.09,4242.06 3563.55,4238.52 3563.55,4236.75 3425.2,4098.39 3425.2,3858.27 ; v3(4141.73,3226.54) 4141.73,3614.17 v3(4385.83,3858.27) 3425.2,3858.27 ; v3(4596.46,2775.59) 4601.6,2775.59 5248.82,2128.37 ; C26.2@5880.46,3720.91 5947.29,3720.91 C27.2@5964.57,3738.19 v6(5964.57,3814.96) ; v3@8031.5,3515.75 8031.5,3577.53 ; 8039.13,3577.02 8090.45,3577.02 C25.2@8115.6,3602.17
  Bottom Layer w50: v3(4141.73,3226.54) 4592.68,2775.59 v3(4596.46,2775.59) ; v3(4385.83,3858.27) 5933.07,3858.27 5964.57,3826.77 v6(5964.57,3814.96) 7728.35,3814.96 v3(8031.5,3511.81)
12V_AC_PH: D3.3 T1.9 | length 424
  Top Layer w50: T1.9@1968.5,2460.63 2185.04,2677.17 D3.3@2302.8,2677.17
12V_ADC: R16.2 TP10.1 U3.CN10_24 | length 372.1
  Top Layer w50: TP10.1@2736.22,2283.46 2737.95,2285.2 2737.95,2324.57 2800.15,2386.76 3008.86,2386.76 3028.79,2406.69 U3.CN10_24@3031.5,2406.69
  Bottom Layer w50: U3.CN10_24@3029.58,2408.61 U3.CN10_24@3031.5,2406.69
12V_Buck: C5.2 C6.2 J3.3 L1.1 R19.2 R20.2 TP11.1 | length 2038.3
  Top Layer w50: J3.3@3525.2,3622.05 4015.75,3622.05 v3(4157.48,3763.78) ; v3@4482.28,4088.58 4635.89,4242.19 R20.2@4635.89,4379.92 ; L1.1@4876.87,4370.08 4876.87,4340.55 5103.25,4114.17 5285.43,4114.17
  Bottom Layer w50: v3(4157.48,3763.78) 4161.42,3763.78 v3(4484.25,4086.61)
12V_TR: C1.1 D3.1 J3.1 R8.2 R15.2 TP8.1 U4.5 | length 4162.1
  Top Layer w20: v2(2259.84,1271.65) 2260.92,1271.65 2262.89,1269.69 U4.5@2362.2,1269.69
  Top Layer w50: TP8.1@2421.26,2202.27 2421.26,1909.45 C1.1@2362.2,1850.39 2689.06,1523.54 R8.2@2689.06,1480.12 ; TP8.1@2421.26,2204.72 2419.53,2206.46 2419.53,2245.47 D3.1@2302.8,2362.2 ; R15.2@2525.05,2391.29 2495.96,2362.2 D3.1@2302.8,2362.2 ; v3(2795.28,3346.46) 2795.28,2932.83 2765.99,2903.54 2480.32,2903.54 2411.42,2834.65 2411.42,2470.83 D3.1@2302.8,2362.2 ; v3(2795.28,3543.31) 2874.02,3622.05 J3.1@3325.2,3622.05
  Bottom Layer w50: v2(2259.84,1271.65) 2259.84,1748.03 C1.1@2362.2,1850.39 ; v3(2795.28,3346.46) v3(2795.28,3543.31)
24VAC+: J7.2 K1.3 pad.5@8779.53,2440.94 T2.8 T2.10 TP29.1 | length 281.9
  Top Layer w50: TP29.1@7519.69,2716.54 7519.69,2590.55 T2.10@7629.92,2480.31
24VAC-: J7.1 K1.6 pad.5@8779.53,2598.43 T2.12 T2.14 TP31.1 | length 300.1
  Top Layer w50: TP31.1@7027.56,2716.54 7169.24,2574.86 7169.24,2484.31 T2.12@7173.23,2480.31 T2.12@7170.73,2477.82
  other v3: 8553.15,2076.77 8622.05,2076.77 8395.67,2125.98 8464.57,2125.98 8553.15,2155.51 8622.05,2155.51 8395.67,2204.72 8464.57,2204.72 8582.68,2598.43 8661.42,2598.43 8582.68,2667.32 8661.42,2667.32 8435.04,2677.17 8503.94,2677.17 8435.04,2776.28 8503.94,2776.28
+3v3: J4.1 R3.2 R5.2 R9.2 R10.2 U2.8 U3.CN7_16 | length 8231.5
  Top Layer w50: U2.8@1812.2,3885.43 1898.43,3799.21 2303.15,3799.21 2554.13,3548.23 ; R10.2@2233.32,1146.61 R9.2@2597.49,1146.61 2597.49,1144.83 2679.33,1062.99 3011.81,1062.99 3955.51,2006.69 4601.57,2006.69 ; R3.2@2319.82,3548.23 2554.13,3548.23 ; v3@3692.91,2915.35 3163.83,3444.44 3162.06,3444.44 3158.51,3447.98 R5.2@3158.51,3449.76 2652.61,3449.76 2554.13,3548.23 ; v3@3860.24,2748.03 4601.57,2006.69 ; U3.CN7_16@5431.5,2006.69 4601.57,2006.69 ; v3(5736.22,2055.12) 5818.58,2055.12 5945.35,2181.89 J4.1@6161.42,2181.89
  Bottom Layer w20: U3.CN7_16@5431.5,2006.69 5481.5,2056.69 5734.65,2056.69 v3(5736.22,2055.12)
  Bottom Layer w50: v3(3690.94,2913.39) v3(3858.27,2746.06)
+5v: C8.2 C9.2 C10.2 D9.1 DS9.2 J4.3 K1.8 L2.1 R26.2 R27.2 TP13.1 | length 8235.9
  Top Layer w20: C10.2@4036.37,4227.41 4032.96,4230.81 4032.96,4297.84 4049.09,4313.96 4049.09,4329.63 4086.12,4366.66 4116.57,4366.66 R27.2@4123.95,4374.05
  Top Layer w50: L2.1@3921.26,4507.87 3921.26,4507.43 3925.79,4502.91 C9.2@4014.81,4502.91 4116.32,4502.91 4156.06,4502.91 4200.31,4458.66 TP13.1@4202.76,4458.66 4330.71,4330.71 4330.71,4019.68 v3(4708.66,3641.73) ; C8.2@4116.78,4497.59 4123.54,4490.83 R27.2@4123.54,4379.36 ; v3(4964.57,3248.03) 5895.67,3248.03 v3(6033.46,3110.24) ; v3@5854.33,1661.42 5854.33,1642.99 5915.35,1581.97 D9.1@5915.35,1566.22 ; J4.3@6161.42,2381.89 6161.42,2598.43 ; v3(6161.42,2726.38) 6161.42,2598.43 ; v3(6889.76,2864.17) 6830.71,2864.17 6564.96,2598.43 6161.42,2598.43 ; K1.8@8750,3120.08 8907.48,3120.08 8952.17,3075.39 8967.91,3075.39 DS9.2@8976.38,3066.93 ; DS9.2@8976.38,3066.93 DS9.2@8976.38,3051.18 DS9.2@8976.38,3066.93
  Bottom Layer w20: v3(6889.76,2864.17) 6909.45,2864.17 6946.85,2901.57 8161.42,2901.57 8379.92,3120.08 K1.8@8750,3120.08
  Bottom Layer w50: v3(4708.66,3641.73) 4964.57,3385.83 v3(4964.57,3248.03) ; v3(5851.65,1664.1) 5851.65,2284.72 5948.82,2381.89 J4.3@6161.42,2381.89 ; v3(6033.46,3110.24) 6161.42,2982.28 v3(6161.42,2726.38)
+36V: C3.2 C4.2 C14.1 C15.1 C16.1 C33.1 DS1.3 DS2.3 DS3.3 DS7.3 DS8.3 pad.5@6771.65,3818.9 pad.5@7204.72,3818.9 pad.5@7795.28,4133.86 Q2.5 Q2.6 Q2.7 Q2.8 Q3.5 Q3.6 Q3.7 Q3.8 R18.2 R29.2 U5.3 | length 2855.4
  Top Layer w50: R29.2@4772.13,3451.46 5281.3,3960.63 v3(5717.34,3960.63) ; C16.1@6023.62,4428.67 6023.62,4266.91 6024.43,4266.91 v3(6330.71,3960.63) ; v3@6330.31,3960.23 6594.49,3696.05 DS7.3@6594.49,3669.55 ; DS3.3@7518.2,3993.5 7544.7,3993.5 DS3.3@7589.7,4038.5
  Bottom Layer w50: v3(5717.34,3960.63) v3(6330.71,3960.63)
A: DS1.1 DS1.2 DS4.3 J5.1 TP16.1 | length 266
  Top Layer w50: DS1.1@6496.06,3956.69 6496.06,4196.95 DS4.3@6514.27,4215.16
B: DS2.1 DS2.2 DS5.3 J5.2 TP17.1 | length 271.1
  Top Layer w50: DS2.1@6929.13,3951.57 6929.13,4196.95 DS5.3@6947.34,4215.16
BrRght: C17.1 C18.1 D5.1 DS8.1 DS8.2 DS11.3 K1.5 pad.5@7500,3375.98 Q3.1 Q3.2 Q3.3 Q5.5 Q5.6 Q5.7 Q5.8 U9.4 | length 1452.3
  Top Layer w20: 7652.56,3272.64 8280.51,3272.64 8413.59,3405.72 8422.45,3405.72 8432.13,3415.4 C18.1@8432.13,3424.26 8432.13,3482.8 8379.54,3535.39 8364.21,3535.39 8362.4,3537.2 U9.4@8362.4,3564.17
  Top Layer w50: 7627.95,3248.03 7652.56,3272.64 7677.17,3297.24 7677.17,3494.09 7732.95,3549.88 7786.81,3549.88 7795.28,3558.35 D5.1@7795.28,3574.09
C: DS3.1 DS3.2 DS6.3 J6.1 TP18.1 | length 271.1
  Top Layer w50: DS3.1@7362.2,3951.57 7362.2,4196.95 DS6.3@7380.41,4215.16
FB5V: C10.1 R25.1 R28.2 U6.4 | length 352.1
  Top Layer w10: U6.4@3742.13,4261.61 3748.74,4255 3748.74,4236.59 3813.02,4172.31 R28.2@3813.02,4163.45
  Top Layer w20: R28.2@3813.02,4163.45 3814.51,4161.96 4034.89,4161.96 C10.1@4036.37,4160.48
FB36V: R21.2 R23.2 U5.1 | length 232.1
  Top Layer w20: U5.1@5427.17,4342.52 5428.98,4340.71 5441.96,4340.71 5453.68,4328.99 5453.68,4216.57 R23.2@5541.28,4216.57
FB_1: R25.2 R26.1 | length 80.6
  Top Layer w20: R25.2@3956.63,4226.41 3956.85,4226.41 3966.54,4236.09 3966.54,4297.5 R26.1@3962.79,4301.24